# Altium PCB MCU_PCB.PcbDoc
Units mm, origin at the board's own origin, x right, y up, seen from the top; angles counter-clockwise.
Board outline 59 x 83 mm, 4 copper layers (Top Layer, Ground Plane, Power Plane, Bottom Layer), stack 0.844 mm thick; 26 components, 51 nets, 210 pads, 40 vias.
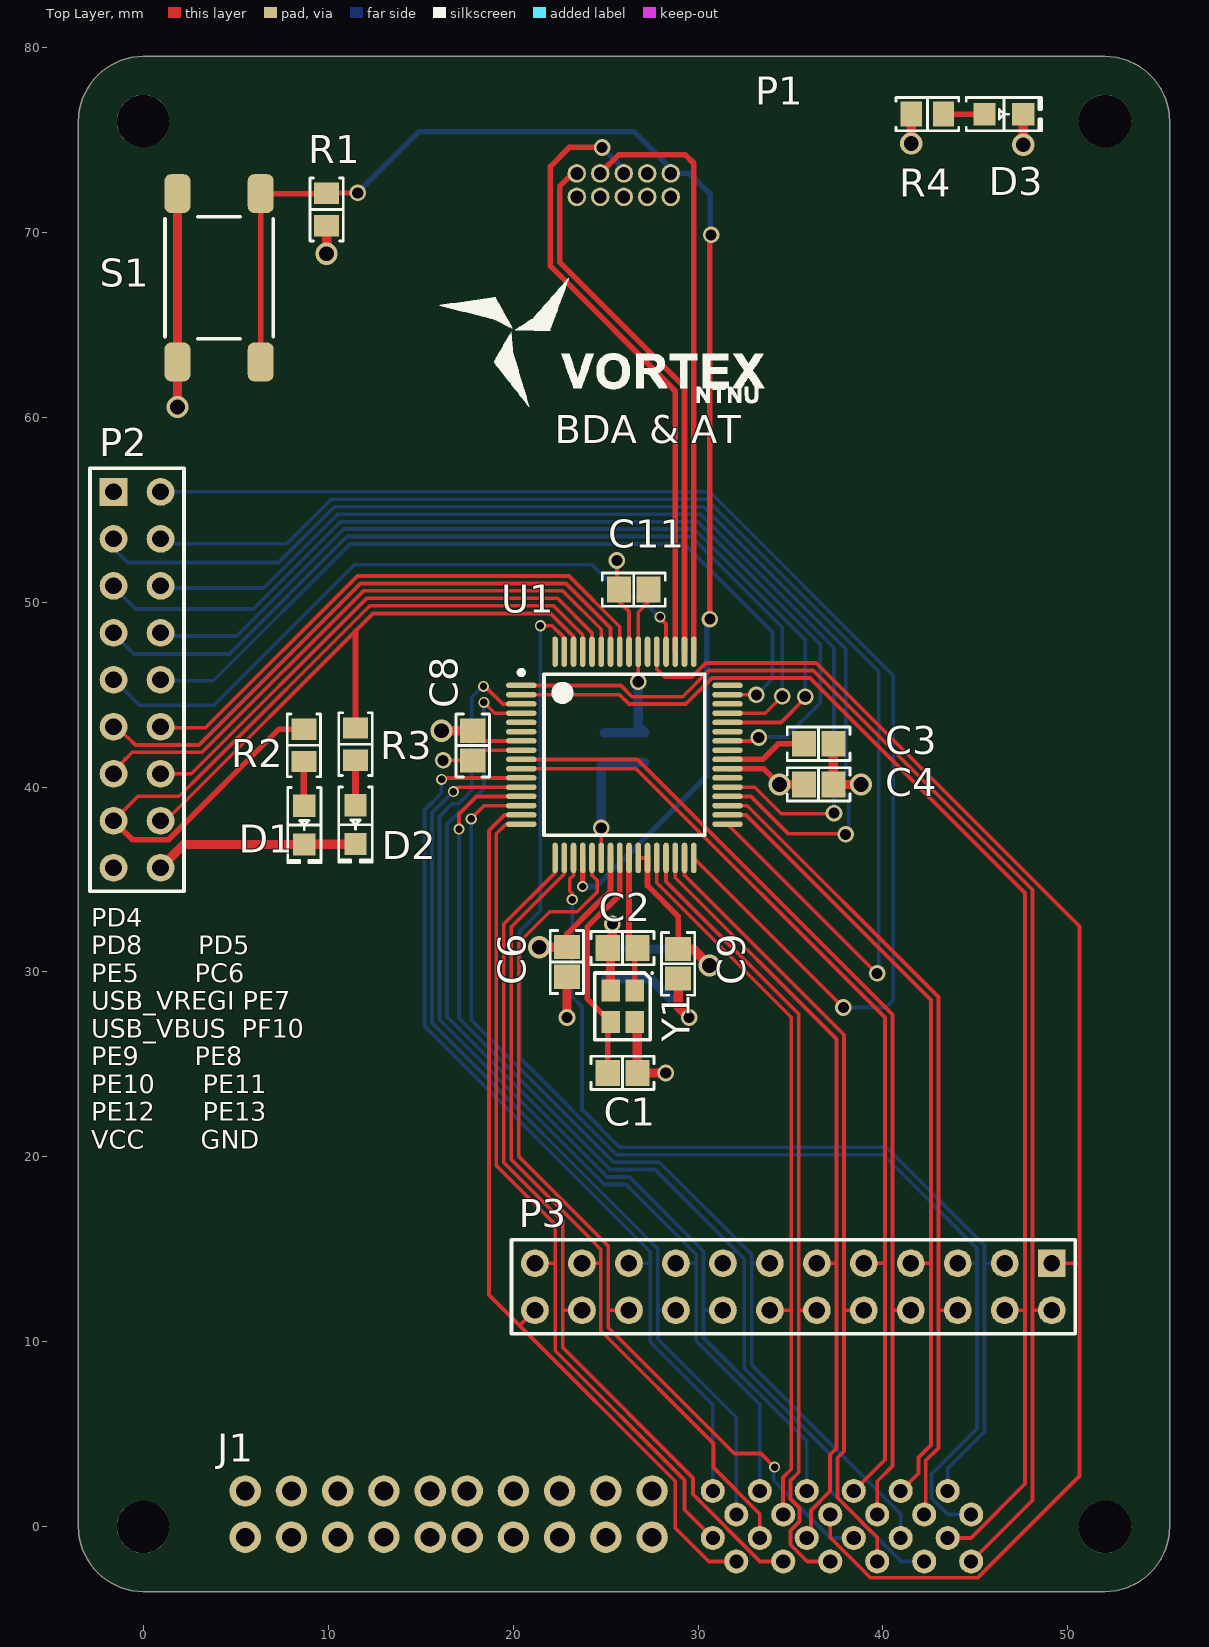
[diagram p0: Top Layer view]
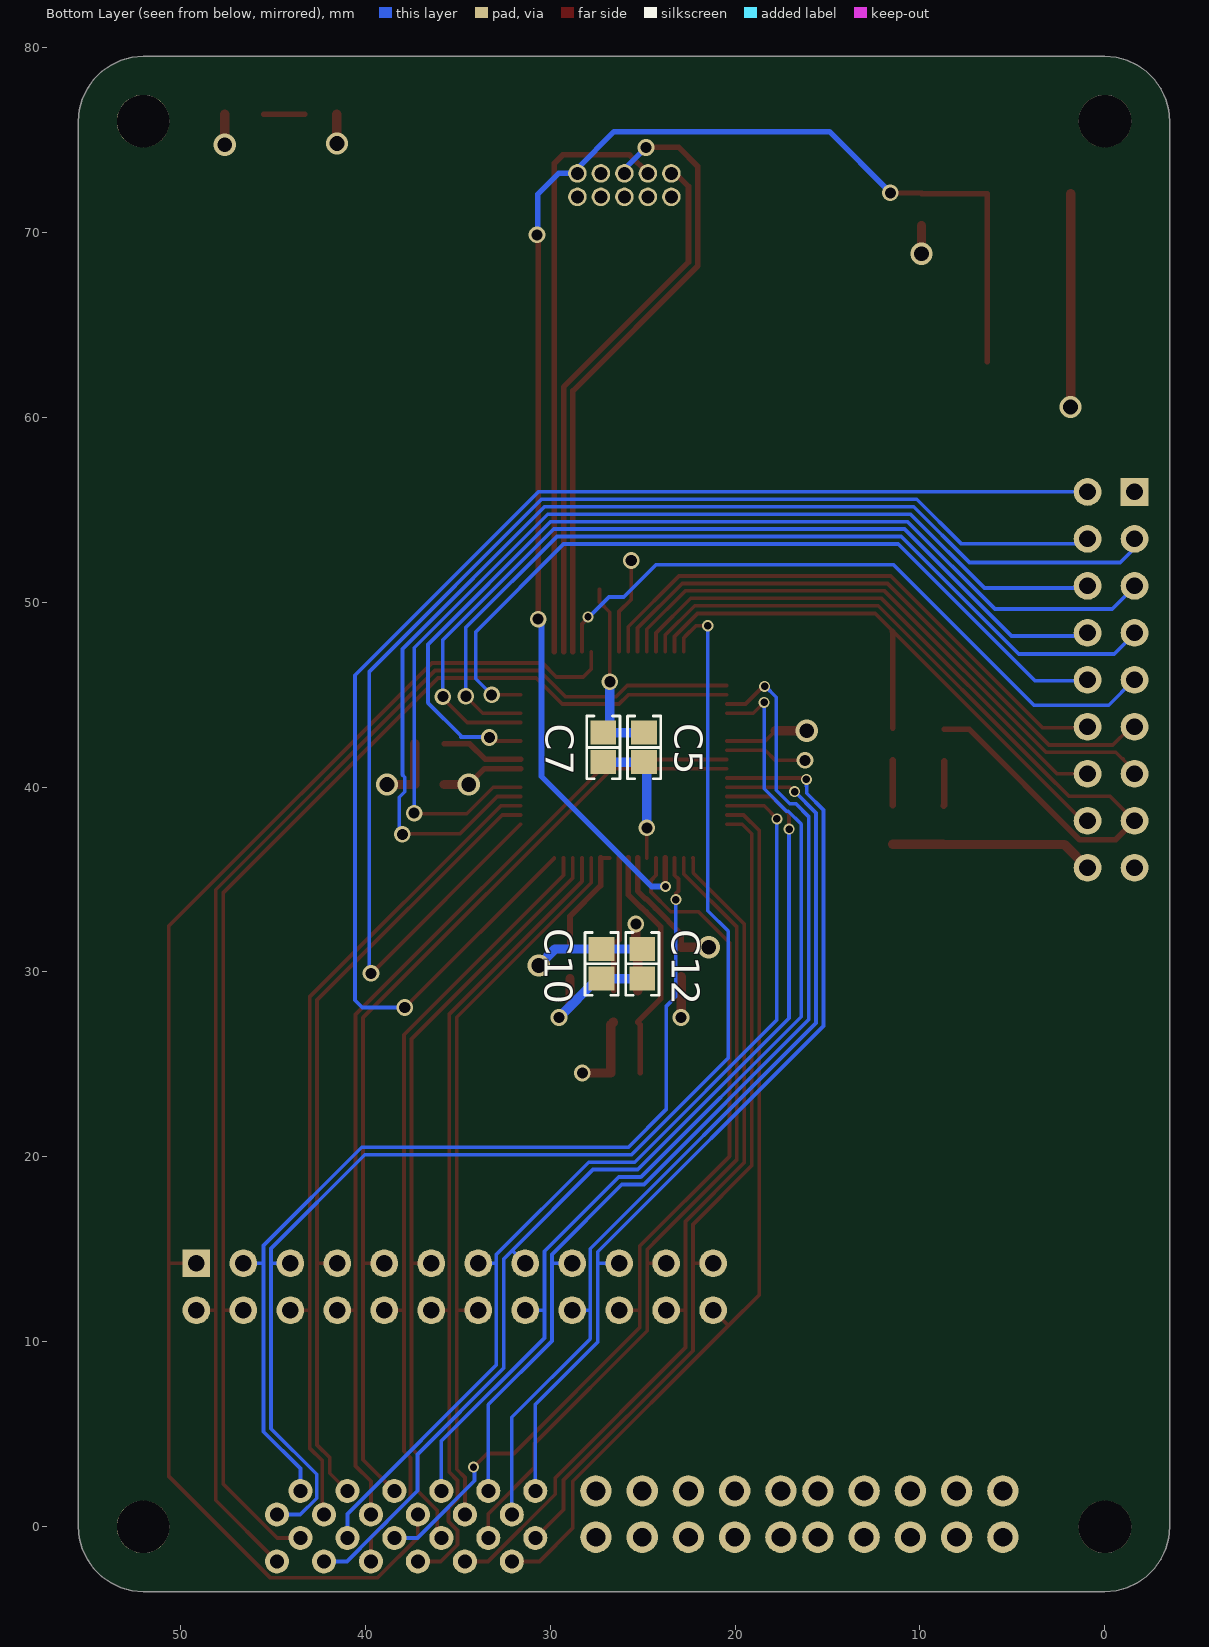
[diagram p1: Bottom Layer view, seen from below]
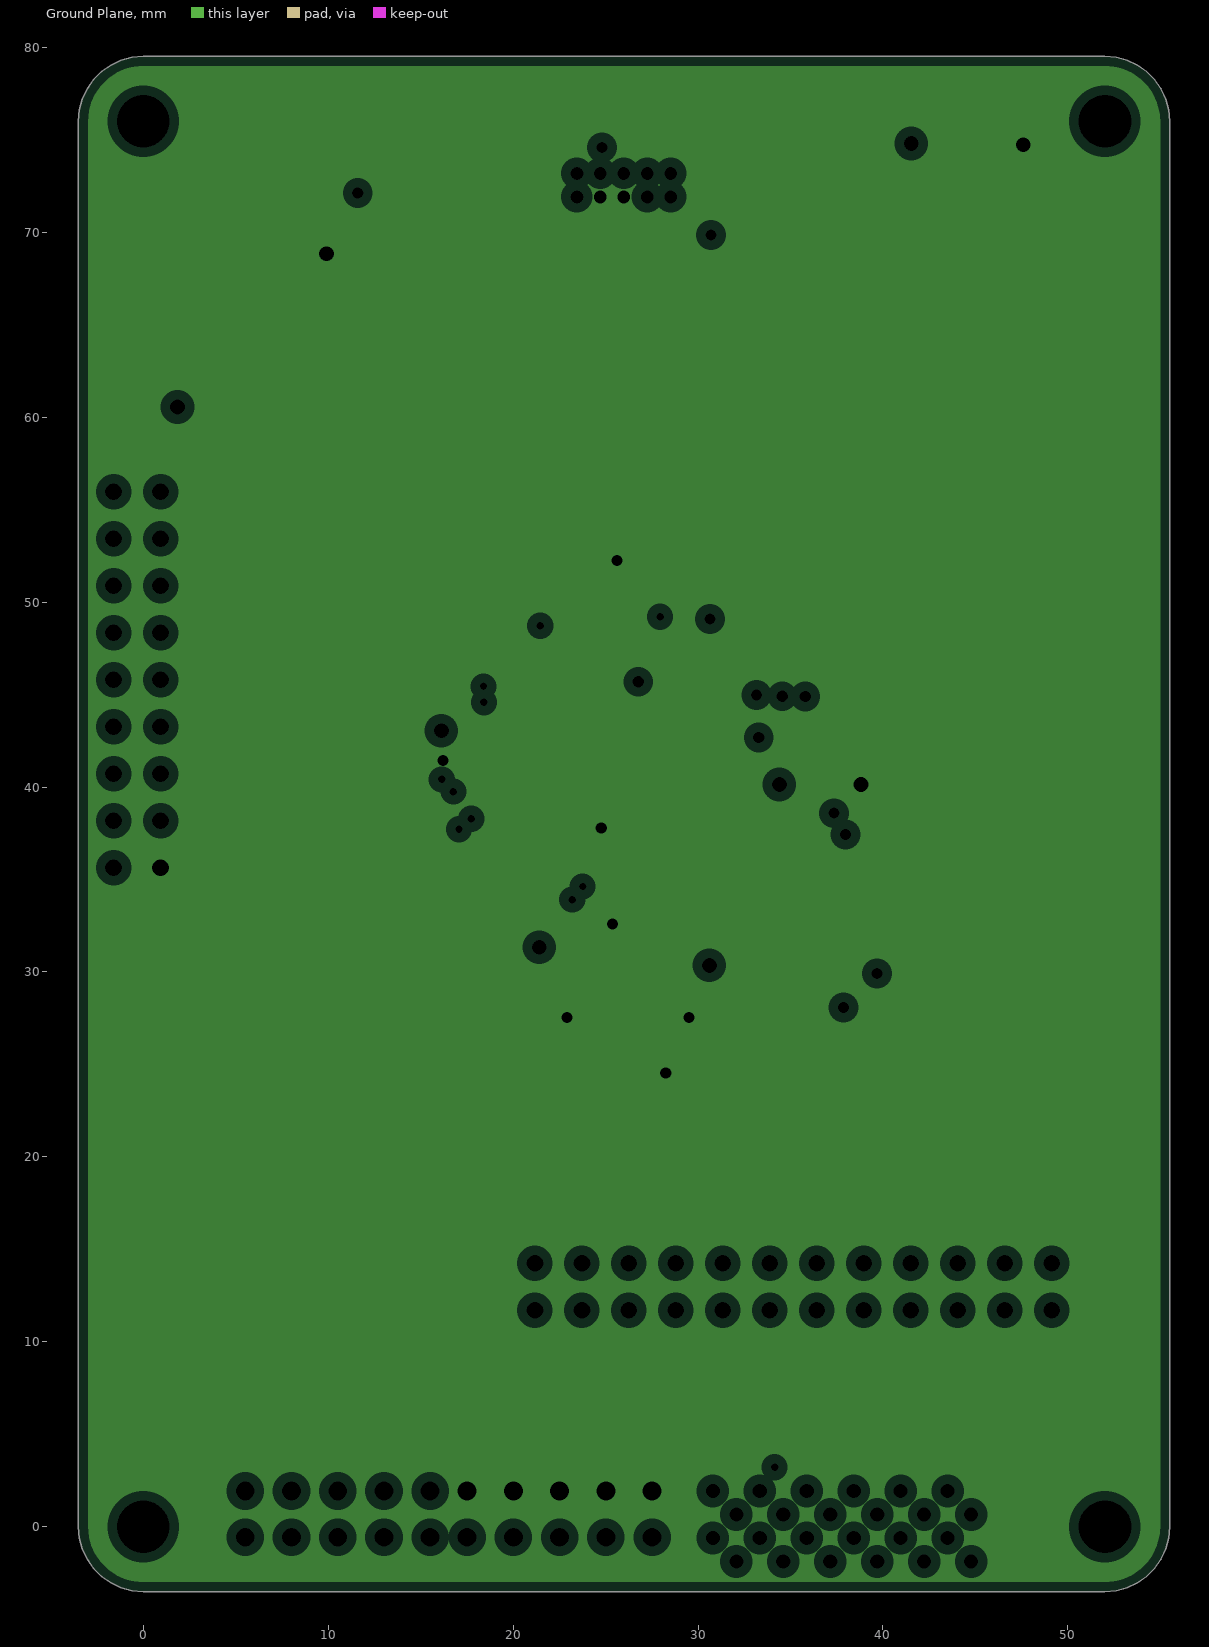
[diagram p2: Ground Plane, clearances drawn from the general rule]
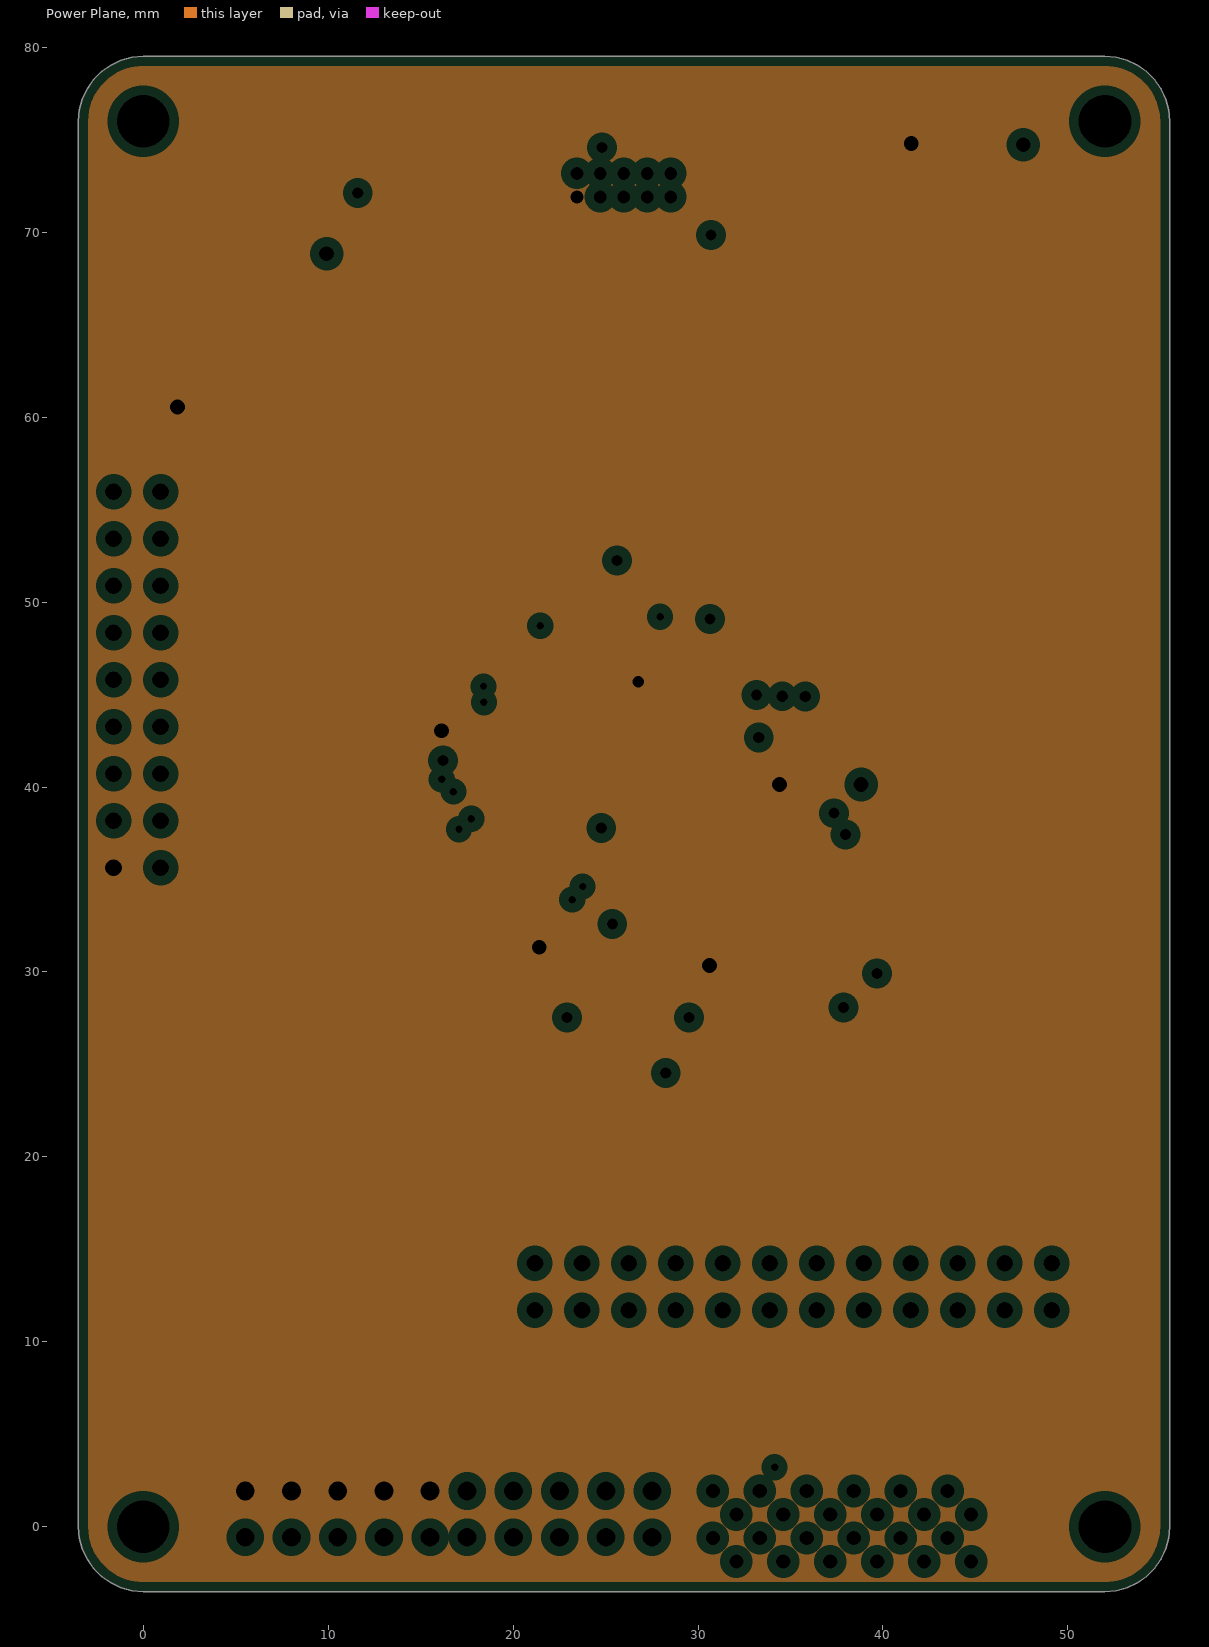
[diagram p3: Power Plane, clearances drawn from the general rule]
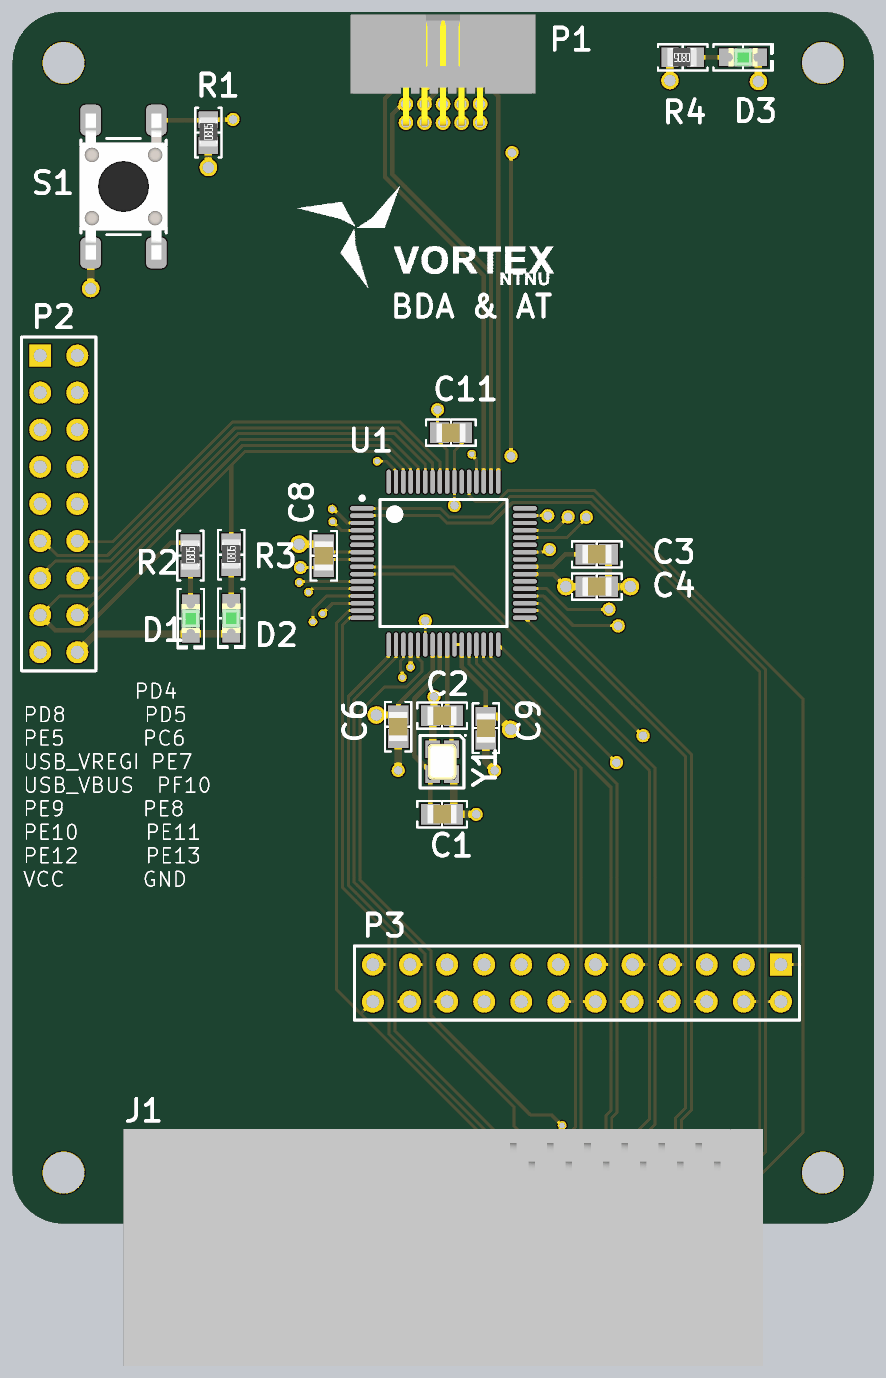
[diagram p4: 3D render of the assembled board from above, using the file's embedded part models]
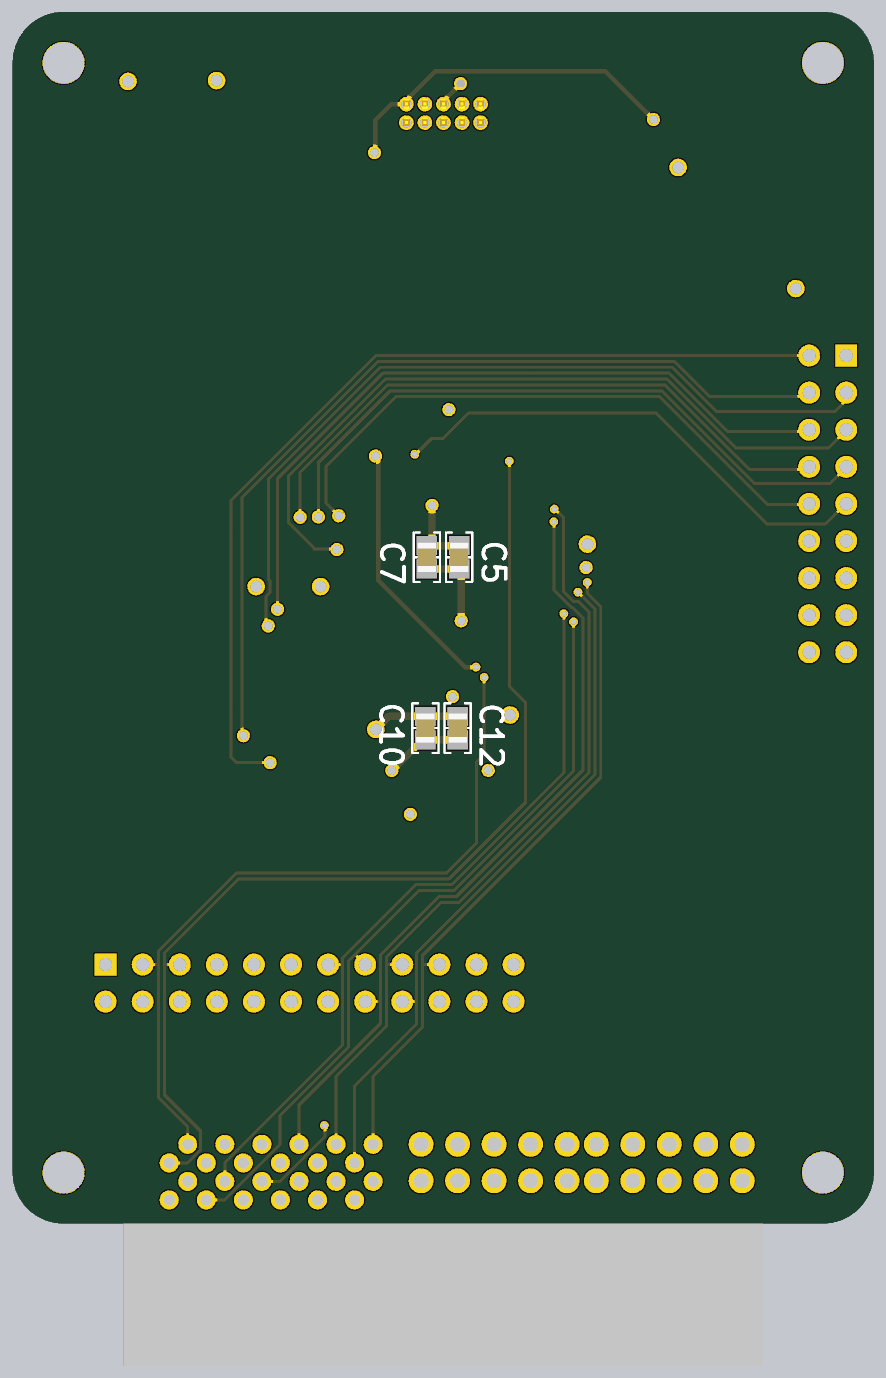
[diagram p5: 3D render of the assembled board from below, using the file's embedded part models]

## Layer stack, top to bottom
Top Solder: solder mask 0.0102, Solder Resist, Dk 3.5
Top Layer: signal copper 0.0356
Dielectric 1: core 0.32, FR-4, Dk 4.8
Ground Plane: plane copper 0.036, net GND
Dielectric 3: prepreg 0.127, Dk 4.2
Power Plane: plane copper 0.036, net VCC
Dielectric 4: core 0.254, Dk 4.2
Bottom Layer: signal copper 0.0356
Bottom Solder: solder mask 0.0102, Solder Resist, Dk 3.5

## Board outline
52,-3.5 52.608,-3.447 53.197,-3.289 53.75,-3.031 54.25,-2.681 54.681,-2.25 55.031,-1.75 55.289,-1.197 55.447,-0.608 55.5,0 55.5,76 55.447,76.608 55.289,77.197 55.031,77.75 54.681,78.25 54.25,78.681 53.75,79.031 53.197,79.289 52.608,79.447 52,79.5 0,79.5 -0.608,79.447 -1.197,79.289 -1.75,79.031 -2.25,78.681 -2.681,78.25 -3.031,77.75 -3.289,77.197 -3.447,76.608 -3.5,76 -3.5,0 -3.447,-0.608 -3.289,-1.197 -3.031,-1.75 -2.681,-2.25 -2.25,-2.681 -1.75,-3.031 -1.197,-3.289 -0.608,-3.447 0,-3.5

## Design rules (kind name [scope] priority, off if disabled: settings)
Clearance [All] p1: gap=0.254 ignorepadtopadclearanceinfootprint=FALSE except(0: Arc-Hole Track-Hole SMDPad-Hole THPad-Hole Via-Hole Fill-Hole Poly-Hole Region-Hole Text-Hole; 0.127: Arc-THPad Track-THPad; 0.152: Arc-SMDPad Track-SMDPad SMDPad-SMDPad; 0.2: Arc-Arc Arc-Track Track-Track)
PlaneClearance [All] p1: clearance=0.508
PlaneConnect [All] p1: planeconnectstyle=Relief reliefexpansion=0.508 reliefentries=4 reliefconductorwidth=0.254 reliefairgap=0.254
PolygonConnect [All] p1: connectstyle=Relief reliefconductorwidth=0.254 reliefentries=4 polygonreliefangle="90 Angle" airgapwidth=0.254
RoutingVias "Routing Via PWR" [(InNet('GND') OR InNet('VCC'))] p1: holewidth=0.8 width=1.2 viastyle="Through Hole" minholewidth=0.6 minwidth=0.9 maxholewidth=1 maxwidth=1.4
RoutingVias [All] p2: holewidth=0.6 width=0.9 viastyle="Through Hole" minholewidth=0.4 minwidth=0.6 maxholewidth=0.8 maxwidth=1.2
SolderMaskExpansion [All] p1: expansion=0.102
Width "Width PWR" [(InNet('GND') OR InNet('VCC'))] p1: maxlimit=0.762 minlimit=0.203 preferedwidth=0.508
Width [All] p2: maxlimit=0.356 minlimit=0.203 preferedwidth=0.3
28 further rules are at their usual default settings.

## Components (designator, comment, footprint, x,y, rotation, side; value= is the part's Value field where it differs from the comment)
C1 "10pF" "CAP 0805/2012" 25.918,24.541 r0 top
C2 "10pF" "CAP 0805/2012" 25.918,31.295 r0 top
C3 "1uF" "CAP 0805/2012" 36.518,42.341 r180 top
C4 "10uF" "CAP 0805/2012" 36.518,40.136 r180 top
C5 "10uF" "CAP 0805/2012" 24.918,42.141 r90 bottom
C6 "10uF" "CAP 0805/2012" 22.914,30.541 r90 top
C7 "0.10uF" "CAP 0805/2012" 27.123,42.141 r90 bottom
C8 "0.10uF" "CAP 0805/2012" 17.818,42.241 r90 top
C9 "10000pF" "CAP 0805/2012" 28.922,30.441 r270 top
C10 "0.10uF" "CAP 0805/2012" 27.218,30.441 r90 bottom
C11 "0.10uF" "CAP 0805/2012" 26.527,50.675 r0 top
C12 "10000pF" "CAP 0805/2012" 25.014,30.441 r270 bottom
D1 "Green" "LED 0805/2012 GREEN" 8.712,37.939 r270 top
D2 "Green" "LED 0805/2012 GREEN" 11.481,37.964 r270 top
D3 "Green" "LED 0805/2012 GREEN" 46.535,76.377 r0 top
J1 "0459854142" CONN_HEADER_4PWR_24SGL_2.36MM 44.768,-1.869 r0 top
P1 "3220-10-0200-00" HDRRA10W40P127_2X5_1265X750X540P 23.444,71.907 r0 top
P2 "Header 9X2A" HDR2X9_CEN -1.6,55.956 r270 top
P3 "Header 12X2" HDR2X12 49.124,14.249 r180 top
R1 "10k" "RES 0805/2012" 9.916,71.223 r90 top
R2 "130" "RES 0805/2012" 8.687,42.254 r90 top
R3 "130" "RES 0805/2012" 11.481,42.316 r90 top
R4 "130" "RES 0805/2012" 42.399,76.377 r180 top
S1 "FSM4JSMATR" "TE FSM4JSMA" 4.105,67.532 r0 top
U1 "EFM32GG942F1024G-E-QFP64" TQFP64_N 26.018,41.741 r0 top
Y1 "16MHz" "NDK NX2520SA" 25.918,28.141 r270 top

## Footprints (in the part's own frame and the unit in brackets; to place one, negate y for a bottom-side part, rotate by r counter-clockwise, add the part's x,y. Pads: shape width x height; smd on the part's side, far side on the other; paste and mask are expansions set on the pad)
"CAP 0805/2012" [mm] "Chip Capacitor, 2-Leads, Body 2.00x1.20mm, IPC Medium Density"
  rect 1.3x1.4 smd: 1(-0.8,0) 2(0.8,0)
  silkscreen extent -1.7,-0.9 1.7,0.9, body extent -1,-0.64 1,0.64, height 1.26
CONN_HEADER_4PWR_24SGL_2.36MM [mm]
  round 1.3 hole 0.76: 1(0,0) 2(-1.27,1.27) 3(-2.54,0) 4(-3.81,1.27) 5(-5.08,0) 6(-6.35,1.27) 7(-7.62,0) 8(-8.89,1.27) 9(-10.16,0) 10(-11.43,1.27) 11(-12.7,0) 12(-13.97,1.27) 13(0,2.53) 14(-1.27,3.81) 15(-2.54,2.53) 16(-3.81,3.81) 17(-5.08,2.53) 18(-6.35,3.81) 19(-7.62,2.53) 20(-8.89,3.81) 21(-10.16,2.53) 22(-11.43,3.81) 23(-12.7,2.53) 24(-13.97,3.81)
  round 1.7 hole 1.02: P1A(-27.25,1.31) P1A(-24.75,1.31) P1A(-22.25,1.31) P1A(-19.75,1.31) P1A(-17.25,1.31) P1B(-27.25,3.81) P1B(-24.75,3.81) P1B(-22.25,3.81) P1B(-19.75,3.81) P1B(-17.25,3.81) P2A(-39.25,1.31) P2A(-36.75,1.31) P2A(-34.25,1.31) P2A(-31.75,1.31) P2A(-29.25,1.31) P2B(-39.25,3.81) P2B(-36.75,3.81) P2B(-34.25,3.81) P2B(-31.75,3.81) P2B(-29.25,3.81)
  body extent -40.65,-11.41 3.13,4.87, height 7.49
HDR2X9_CEN [mm] "Connector; Header; 9x2 Position"
  rect 1.5x1.5 hole 0.9: 1(0,0)
  round 1.5 hole 0.9: 2(2.54,0) 3(5.08,0) 4(7.62,0) 5(10.16,0) 6(12.7,0) 7(15.24,0) 8(17.78,0) 9(20.32,0) 10(0,2.54) 11(2.54,2.54) 12(5.08,2.54) 13(7.62,2.54) 14(10.16,2.54) 15(12.7,2.54) 16(15.24,2.54) 17(17.78,2.54) 18(20.32,2.54)
  silkscreen extent -1.27,-1.27 21.59,3.81
HDR2X12 [mm] "Connector; Header; 12x2 Position"
  rect 1.5x1.5 hole 0.9: 1(0,0)
  round 1.5 hole 0.9: 2(0,2.54) 3(2.54,0) 4(2.54,2.54) 5(5.08,0) 6(5.08,2.54) 7(7.62,0) 8(7.62,2.54) 9(10.16,0) 10(10.16,2.54) 11(12.7,0) 12(12.7,2.54) 13(15.24,0) 14(15.24,2.54) 15(17.78,0) 16(17.78,2.54) 17(20.32,0) 18(20.32,2.54) 19(22.86,0) 20(22.86,2.54) 21(25.4,0) 22(25.4,2.54) 23(27.94,0) 24(27.94,2.54)
  silkscreen extent -1.27,-1.27 29.21,3.81
HDRRA10W40P127_2X5_1265X750X540P [mm]
  round 1 hole 0.7: 1(0,0) 2(0,1.27) 3(1.27,0) 4(1.27,1.27) 5(2.54,0) 6(2.54,1.27) 7(3.81,0) 8(3.81,1.27) 9(5.08,0) 10(5.08,1.27)
  body extent -3.78,-0.18 8.87,7.39, height 5.18
"LED 0805/2012 GREEN" [mm] "Chip Diode, 2-Leads, Body 2.00x1.25mm, IPC Medium Density"
  rect 1.2x1.2 smd: 1(-1.05,0) 2(1.05,0)
  silkscreen extent -2.03,-0.9 2.03,0.9, body extent -1,-0.62 1,0.63, height 0.9
"NDK NX2520SA" [mm] "Crystal, 4-Leads, Body 2.00x2.50mm, Pitch 1.70mm, IPC Medium Density"
  rect 1.2x1 smd: 1(-0.85,0.65) 2(-0.85,-0.65) 3(0.85,-0.65) 4(0.85,0.65)
  silkscreen extent -1.85,-1.5 1.8,1.65, body extent -1.26,-1.01 1.26,1.01, height 0.5
"RES 0805/2012" [mm] "Chip Resistor, 2-Leads, Body 2.00x1.25mm, IPC Medium Density"
  rect 1.15x1.35 smd: 1(-0.875,0) 2(0.875,0)
  silkscreen extent -1.7,-0.9 1.7,0.9, body extent -0.95,-0.62 1.05,0.63, height 0.6
"TE FSM4JSMA" [mm]
  rrect50% 1.4x2.1 smd: 1(2.25,4.55) 2(2.25,-4.55) 3(-2.25,4.55) 4(-2.25,-4.55)
  silkscreen extent -2.92,-3.3 2.92,3.3, body extent -3,-5 3,5, height 5.08
TQFP64_N [mm]
  oval 1.65x0.3 smd: 1(-5.575,3.75) 2(-5.575,3.25) 3(-5.575,2.75) 4(-5.575,2.25) 5(-5.575,1.75) 6(-5.575,1.25) 7(-5.575,0.75) 8(-5.575,0.25) 9(-5.575,-0.25) 10(-5.575,-0.75) 11(-5.575,-1.25) 12(-5.575,-1.75) 13(-5.575,-2.25) 14(-5.575,-2.75) 15(-5.575,-3.25) 16(-5.575,-3.75) 33(5.575,-3.75) 34(5.575,-3.25) 35(5.575,-2.75) 36(5.575,-2.25) 37(5.575,-1.75) 38(5.575,-1.25) 39(5.575,-0.75) 40(5.575,-0.25) 41(5.575,0.25) 42(5.575,0.75) 43(5.575,1.25) 44(5.575,1.75) 45(5.575,2.25) 46(5.575,2.75) 47(5.575,3.25) 48(5.575,3.75)
  oval 0.3x1.65 smd: 17(-3.75,-5.575) 18(-3.25,-5.575) 19(-2.75,-5.575) 20(-2.25,-5.575) 21(-1.75,-5.575) 22(-1.25,-5.575) 23(-0.75,-5.575) 24(-0.25,-5.575) 25(0.25,-5.575) 26(0.75,-5.575) 27(1.25,-5.575) 28(1.75,-5.575) 29(2.25,-5.575) 30(2.75,-5.575) 31(3.25,-5.575) 32(3.75,-5.575) 49(3.75,5.575) 50(3.25,5.575) 51(2.75,5.575) 52(2.25,5.575) 53(1.75,5.575) 54(1.25,5.575) 55(0.75,5.575) 56(0.25,5.575) 57(-0.25,5.575) 58(-0.75,5.575) 59(-1.25,5.575) 60(-1.75,5.575) 61(-2.25,5.575) 62(-2.75,5.575) 63(-3.25,5.575) 64(-3.75,5.575)
  silkscreen extent -5.7,-4.35 4.35,4.57, body extent -5,-5 5,5, height 1.2

## Part data
C1 C2: library part C0805C100J1GACTU, "CAP CER 10PF 100V NP0 0805", Device Package="0805 (2012 Metric)", Manufacturer=Kemet, Supplier Part Number 1=399-1109-2-ND, TemperatureCoefficient="C0G, NP0", TemperatureRange="-55C ~ 125C", Tolerance=5%, Voltage=100V, ComponentLink1Description=Datasheet, ComponentLink1URL=http://www.kemet.com/docfinder?Partnumber=C0805C100J1GACTU, ComponentLink2Description="Digi-Key Listing", ComponentLink2URL=https://www.digikey.com/product-detail/en/kemet/C0805C100J1GACTU/399-1109-2-ND/411108, PartId=14386, Part Number=C0805C100J1GACTU, Price=0,0236, Supplier 1=Digi-Key
C3: library part GRM219R71E105KA88D, "CAP CER 1UF 25V X7R 0805", Device Package="0805 (2012 Metric)", Manufacturer="Murata Electronics North America", Supplier Part Number 1=490-5899-2-ND, TemperatureCoefficient=X7R, TemperatureRange="-55C ~ 125C", Tolerance=10%, Voltage=25V, ComponentLink1Description=Datasheet, ComponentLink1URL=http://www.murata.com/~/media/webrenewal/support/library/catalog/products/capacitor/mlcc/c02e.pdf, ComponentLink2Description="Digi-Key Listing", ComponentLink2URL=https://www.digikey.com/product-detail/en/murata-electronics-north-america/GRM219R71E105KA88D/490-5899-2-ND/2546469, PartId=14171, Part Number=GRM219R71E105KA88D, Price=0,0422, Supplier 1=Digi-Key
C4 C5 C6: library part JMK212BJ106KD-T, "CAP CER 10UF 6.3V X5R 0805", Device Package="0805 (2012 Metric)", Manufacturer="Taiyo Yuden", Supplier Part Number 1=587-1304-2-ND, TemperatureCoefficient=X5R, TemperatureRange="-55C ~ 85C", Tolerance=10%, Voltage=6.3V, ComponentLink1Description=Datasheet, ComponentLink1URL=http://www.yuden.co.jp/productdata/catalog/en/mlcc_all_e.pdf, ComponentLink2Description="Digi-Key Listing", ComponentLink2URL=https://www.digikey.com/product-detail/en/taiyo-yuden/JMK212BJ106KD-T/587-1304-2-ND/930656, PartId=13750, Part Number=JMK212BJ106KD-T, Price=0,032, Supplier 1=Digi-Key
C7 C8 C10 C11: library part GRM21BR71E104KA01L, "CAP CER 0.1UF 25V X7R 0805", Device Package="0805 (2012 Metric)", Manufacturer="Murata Electronics North America", Supplier Part Number 1=490-1673-2-ND, TemperatureCoefficient=X7R, TemperatureRange="-55C ~ 125C", Tolerance=10%, Voltage=25V, ComponentLink1Description=Datasheet, ComponentLink1URL=http://www.murata.com/~/media/webrenewal/support/library/catalog/products/capacitor/mlcc/c02e.pdf, ComponentLink2Description="Digi-Key Listing", ComponentLink2URL=https://www.digikey.com/product-detail/en/murata-electronics-north-america/GRM21BR71E104KA01L/490-1673-2-ND/586699, PartId=13708, Part Number=GRM21BR71E104KA01L, Price=0,0092, Supplier 1=Digi-Key
C9 C12: library part CC0805JRX7R9BB103, "CAP CER 10000PF 50V X7R 0805", Device Package="0805 (2012 Metric)", Manufacturer=Yageo, Supplier Part Number 1=311-1857-2-ND, TemperatureCoefficient=X7R, TemperatureRange="-55C ~ 125C", Tolerance=5%, Voltage=50V, ComponentLink1Description=Datasheet, ComponentLink1URL=http://www.yageo.com/documents/recent/UPY-GPHC_X7R_6.3V-to-50V-v12.pdf, ComponentLink2Description="Digi-Key listing", ComponentLink2URL=http://digikey.com/product-detail/en/CC0805JRX7R9BB103/311-1857-2-ND/5195264, PartId=5807, Part Number=CC0805JRX7R9BB103, Price=0,0193, Supplier 1=Digi-Key, Type=-
D1 D2 D3: library part LTST-C171KGKT, "LED GREEN CLEAR 0805 SMD", Current (Test)=20mA, Device Package="0805 (2012 Metric)", Manufacturer="Lite-On Inc.", Supplier Part Number 1=160-1426-2-ND, Voltage Forward=2V, Colour=Green, ComponentLink1Description=Datasheet, ComponentLink1URL=http://optoelectronics.liteon.com/upload/download/DS22-2000-118/S_110_LTST-C171KGKT.pdf, ComponentLink2Description="Digi-Key Listing", ComponentLink2URL=http://www.digikey.ca/product-detail/en/LTST-C171KGKT/160-1426-2-ND/386799, Lens Transparency=Clear, Millicandela=35mcd, PartId=7080, Part Number=LTST-C171KGKT, Price=0,0638, Supplier 1=Digi-Key, Type="Surface Mount", Viewing Angle=130
J1: Supplier Part Number 1=WM8736-ND, ComponentLink1Description="Manufacturer Link", ComponentLink1URL=http://www.molex.com/, ComponentLink2Description=Datasheet, ComponentLink2URL=http://www.molex.com/pdm_docs/sd/459854111_sd.pdf, Mounting Type="Through Hole", Number Of Positions=28, Number Of Rows=2, Part Number=0459854142, Supplier 1=Digi-Key
P1: Supplier Part Number 1=1175-1628-ND, ComponentLink1Description="Manufacturer Link", ComponentLink1URL=http://www.cnctech.us/, ComponentLink2Description=Datasheet, ComponentLink2URL=http://cnctech.us/pdfs/3220-XX-0200-00.pdf, Mounting Type="Through Hole", Number Of Positions=10, Number Of Rows=2, Part Number=3220-10-0200-00, Supplier 1=Digi-Key
P2: "Header, 9-Pin, Dual row", LatestRevisionDate=17-Jul-2002, LatestRevisionNote="Re-released for DXP Platform.", Publisher="Altium Limited"
P3: "Header, 12-Pin, Dual row", LatestRevisionDate=17-Jul-2002, LatestRevisionNote="Re-released for DXP Platform.", Publisher="Altium Limited"
R1: library part ERJ-6ENF1002V, "RES SMD 10K OHM 1% 1/8W 0805", Device Package="0805 (2012 Metric)", Manufacturer="Panasonic Electronic Components", PowerRating="0.125W, 1/8W", Supplier Part Number 1=P10.0KCTR-ND, TemperatureCoefficient=100ppm/C, TemperatureRange="-55C ~ 155C", Tolerance=1%, ComponentLink1Description=Datasheet, ComponentLink1URL=http://industrial.panasonic.com/www-cgi/jvcr13pz.cgi?E+PZ+3+AOA0002+ERJ6ENF1002V+7+WW, ComponentLink2Description="Digi-Key listing", ComponentLink2URL=http://digikey.com/product-detail/en/ERJ-6ENF1002V/P10.0KCTR-ND/111474, PartId=1947, Part Number=ERJ-6ENF1002V, Price=0,0073, Supplier 1=Digi-Key, Type="Thick Film"
R2 R3 R4: library part ERJ-6ENF1300V, "RES SMD 130 OHM 1% 1/8W 0805", Device Package="0805 (2012 Metric)", Manufacturer="Panasonic Electronic Components", PowerRating="0.125W, 1/8W", Supplier Part Number 1=P130CTR-ND, TemperatureCoefficient=100ppm/C, TemperatureRange="-55C ~ 155C", Tolerance=1%, ComponentLink1Description=Datasheet, ComponentLink1URL=http://industrial.panasonic.com/www-cgi/jvcr13pz.cgi?E+PZ+3+AOA0002+ERJ6ENF1300V+7+WW, ComponentLink2Description="Digi-Key listing", ComponentLink2URL=http://digikey.com/product-detail/en/ERJ-6ENF1300V/P130CTR-ND/111111, PartId=2345, Part Number=ERJ-6ENF1300V, Price=0,0073, Supplier 1=Digi-Key, Type="Thick Film"
S1: "SWITCH TACTILE SPST-NO 0.05A 24V", Contact Rating @ Voltage="0.05A @ 24VDC", Illumination Type, Colour=-, Manufacturer="TE Connectivity Alcoswitch Switches", Operating Force=160gf, Operating Temperature="-35C ~ 85C", Supplier Part Number 1=450-1759-2-ND, Actuator Orientation="Top Actuated", Actuator Type=Standard, Circuit=SPST-NO, ComponentLink1Description=Datasheet, ComponentLink1URL=http://www.te.com/commerce/DocumentDelivery/DDEController?Action=srchrtrv&DocNm=2-1437565-7&DocType=Customer+Drawing&DocLang=English, ComponentLink2Description="Digi-Key Listing", ComponentLink2URL=http://www.digikey.com/product-detail/en/FSM4JSMATR/450-1759-2-ND/529675, Illumination=Non-Illuminated, Illumination Voltage=-, Mechanical Life="100,000 Cycles", PartId=8249, Part Number=FSM4JSMATR, Price=0,128, Supplier 1=Digi-Key, Switch Function=Off-Mom, Switch Travel=0.25mm
U1: Supplier Part Number 1=336-4157-ND, ComponentLink1Description="Manufacturer Link", ComponentLink1URL=https://www.silabs.com, ComponentLink2Description=Datasheet, ComponentLink2URL=https://www.silabs.com/documents/public/data-sheets/EFM32GG942.pdf, Part Number=EFM32GG942F1024G-E-QFP64, Supplier 1=Digi-Key
Y1: library part NX2520SA-16.000000MHZ, "CRYSTAL 16.0000MHZ 10PF SMD", Device Package="4-SMD, No Lead (DFN, LCC)", Frequency Stability=10ppm, Load Capacitance=10pF, Manufacturer=NDK, Operating Mode=Fundamental, Supplier Part Number 1=644-1059-2-ND, ComponentLink1Description=Datasheet, ComponentLink1URL=http://media.digikey.com/pdf/Data%20Sheets/NDK%20PDFs/NX2520SA.pdf, ComponentLink2Description="Digi-Key Listing", ComponentLink2URL=http://www.digikey.com/product-detail/en/NX2520SA-16.000000MHZ/644-1059-2-ND/1128841, ESR="80 Ohm", Frequency=16MHz, Frequency Tolerance=10ppm, PartId=8496, Part Number=NX2520SA-16.000000MHZ, Price=0,7336, Supplier 1=Digi-Key, Type="MHz Crystal"

## Free pads (board coordinates)
  round 2.845 hole 2.845: 1(0,0) 1(0,76) 1(52,0) 1(52,76)

## Via types
v1: diameter 0.9, hole 0.6, Top Layer to Bottom Layer, 20 vias
v2: diameter 0.6, hole 0.4, Top Layer to Bottom Layer, 11 vias
v3: diameter 1.2, hole 0.8, Top Layer to Bottom Layer, 9 vias

## Nets (pads, with @x,y where several pads share a name; then routed paths per layer and width w, separated by ;. In a path a pad name is that pad's centre, name@x,y a point inside that pad or via, vN(x,y) a via of type N, cw(c..) or ccw(c..) an arc to the next point about the centre after c; other vN are vias at no path point)
CLK+: C1.1 U1.24 Y1.3 | length 12.9
  Top Layer w0.3: C1.1 25.118,27.141 Y1.3 24.018,28.541 24.018,32.456 24.807,33.245 25.032,33.469 25.066,33.469 25.768,34.171 25.768,34.675 U1.24
CLK-: C2.2 U1.25 Y1.1 | length 7.4
  Top Layer w0.3: U1.25 26.268,31.745 C2.2 26.568,31.145 Y1.1
GND: C1.2 C2.1 C3.1 C4.1 C5.1 C6.1 C7.1 C8.1 C9.2 C10.1 C11.1 C12.2 D1.2 D2.2 D3.2 J1.P1B P1.3 P1.5 P2.18 R1.1 U1.8 U1.22 U1.56 Y1.2 Y1.4 | length 53.2
  Top Layer w0.203: v1(16.218,41.441) C8.1 18.368,41.991 U1.8 ; U1.22 v1(24.768,37.791) ; v1(25.613,52.249) 25.613,50.145 26.268,49.49 U1.56
  Top Layer w0.508: P2.18 2.193,36.889 D1.2 8.738,36.914 D2.2 ; v3(9.916,68.836) R1.1 ; C6.1 22.914,27.545 v1(22.918,27.541) ; v1@25.253,32.595 v1(25.365,32.595) 25.365,31.541 C2.1 25.268,31.145 Y1.2 ; Y1.4 26.718,27.141 C1.2 26.721,24.538 v1(28.255,24.538) ; C9.2 28.922,28.136 v1(29.518,27.541) ; C3.1 C4.1 v3(38.814,40.136) ; v3(47.585,74.727) D3.2
  Bottom Layer w0.508: v1(24.768,37.791) 24.768,41.191 C5.1 C7.1 ; C12.2 C10.1 27.418,29.641 v1(29.518,27.541)
GPIO0: J1.19 P3.1 U1.53 | length 79.3
  Top Layer w0.203: U1.53 27.772,47.312 27.772,46.382 28.204,45.95 29.666,45.95 30.417,46.701 36.391,46.701 50.622,32.47 50.622,14.275 ; J1.19 37.148,-0.572 39.324,-2.748 45.139,-2.748 45.139,-2.741 50.622,2.742 50.622,14.275 ; P3.1 50.597,14.249 50.622,14.275
GPIO1: J1.20 P3.16 U1.4 | length 55.6
  Top Layer w0.203: v2(18.425,44.579) 19.013,43.991 U1.4
  Bottom Layer w0.203: v2(18.425,44.579) 18.425,39.906 17.212,38.694 17.125,38.694 16.423,37.992 16.423,27.579 25.091,18.91 26.288,18.91 30.302,14.896 30.302,11.735 ; P3.16 30.328,11.709 30.302,11.735 ; J1.20 35.878,4.638 30.302,10.214 30.302,11.735
GPIO2: J1.21 P3.14 U1.28 | length 39.9
  Top Layer w0.203: U1.28 27.768,34.829 35.042,27.555 35.042,11.709 ; P3.14 35.042,11.709 ; J1.21 34.596,0.672 34.596,2.672 35.042,3.117 35.042,11.709
GPIO3: J1.22 P3.17 U1.3 | length 56.1
  Top Layer w0.203: v2(18.399,45.442) 18.488,45.442 19.44,44.491 U1.3
  Bottom Layer w0.203: v2@18.38,45.461 17.769,44.85 17.769,39.821 17.045,39.097 16.704,39.097 16.02,38.413 16.02,27.412 24.924,18.507 26.121,18.507 29.899,14.729 29.899,14.275 ; P3.17 29.874,14.249 29.899,14.275 ; J1.22 33.338,6.607 29.899,10.047 29.899,14.275
GPIO4: J1.23 P3.18 U1.12 | length 51.1
  Top Layer w0.203: v2(16.774,39.753) 17.012,39.991 U1.12
  Bottom Layer w0.203: v2(16.774,39.753) 15.617,38.595 15.617,27.245 27.825,15.036 27.825,11.735 ; P3.18 27.85,11.709 27.825,11.735 ; J1.23 32.068,5.92 27.825,10.164 27.825,11.735
GPIO5: J1.24 P3.19 U1.11 | length 50.8
  Top Layer w0.203: v2(16.139,40.413) 16.215,40.489 20.442,40.489 U1.11
  Bottom Layer w0.203: v2(16.139,40.413) 16.139,40.045 16.118,40.024 16.118,39.667 15.213,38.762 15.213,27.078 27.422,14.869 27.422,14.249 ; P3.19 27.422,14.249 ; J1.24 30.798,6.62 27.422,9.997 27.422,14.249
NetC3_2: C3.2 U1.40 | length 4.5
  Top Layer w0.3: U1.40 33.498,41.491 34.348,42.341 C3.2
NetD1_1: D1.1 R2.1 | length 2.4
  Top Layer w0.356: R2.1 8.687,39.014 D1.1
NetD2_1: D2.1 R3.1 | length 2.4
  Top Layer w0.356: D2.1 R3.1
NetD3_1: D3.1 R4.1 | length 2.2
  Top Layer w0.3: R4.1 D3.1
PC6: P2.12 U1.37 | length 56.4
  Top Layer w0.203: U1.37 33.071,39.991 34.503,38.559 37.322,38.559 v1(37.348,38.584)
  Bottom Layer w0.203: P2.12 1.057,50.759 6.518,50.759 10.508,54.75 ; 10.516,54.751 30.13,54.751 37.348,47.534 v1(37.348,38.584)
PD4: P2.10 U1.32 | length 75.6
  Top Layer w0.203: U1.32 v1(37.856,28.078)
  Bottom Layer w0.203: P2.10 P2.10@0.943,55.959 ; P2.10@0.94,55.961 30.631,55.961 40.548,46.044 40.548,28.475 40.151,28.078 v1(37.856,28.078)
PD5: P2.11 U1.33 | length 71.7
  Top Layer w0.203: U1.33 39.661,29.923 v1(39.685,29.923)
  Bottom Layer w0.203: P2.11@0.787,53.264 0.893,53.158 7.776,53.158 10.174,55.556 ; 10.185,55.558 30.464,55.558 39.77,46.253 39.77,30.008 v1(39.685,29.923)
PD8: P2.2 U1.36 | length 62.3
  Top Layer w0.203: U1.36 32.86,39.491 34.884,37.467 37.957,37.467 v1(37.983,37.441)
  Bottom Layer w0.203: P2.2 -1.6,52.908 -0.829,52.137 7.325,52.137 10.341,55.153 ; 10.363,55.154 30.297,55.154 37.983,47.469 37.983,40.657 37.858,40.532 37.858,39.74 38.153,39.445 38.153,37.612 v1(37.983,37.441)
PE5: P2.3 U1.42 | length 52.6
  Top Layer w0.203: U1.42 32.999,42.491 33.258,42.75 33.284,42.724 v1(33.284,42.674)
  Bottom Layer w0.203: P2.3 -1.6,50.825 -0.398,49.623 5.952,49.623 10.675,54.346 ; 10.693,54.348 29.963,54.348 36.604,47.707 36.604,44.55 34.833,42.779 34.833,42.699 33.309,42.699 v1(33.284,42.674)
PE7: P2.13 U1.44 | length 47.7
  Top Layer w0.203: U1.44 34.482,43.491 35.798,44.807 v1(35.798,44.883)
  Bottom Layer w0.203: P2.13 1.118,48.158 5.057,48.158 10.842,53.943 ; 10.846,53.945 29.796,53.945 35.798,47.943 v1(35.798,44.883)
PE8: P2.15 U1.57 | length 30.4
  Top Layer w0.203: P2.15@1.194,43.231 1.219,43.205 3.378,43.205 11.582,51.41 ; 11.608,51.411 23.022,51.411 25.768,48.665 U1.57
PE9: P2.6 U1.58 | length 32.7
  Top Layer w0.203: P2.6@-1.245,43.078 -0.832,42.666 -0.807,42.666 -0.418,42.278 3.021,42.278 11.749,51.006 ; 11.76,51.008 22.855,51.008 25.268,48.595 U1.58
PE10: P2.7 U1.59 | length 32.4
  Top Layer w0.203: P2.7@-1.499,40.996 -1.464,40.996 -0.931,41.529 ; -0.991,41.529 -0.931,41.529 ; 11.913,50.605 22.688,50.605 24.768,48.525 U1.59 ; 11.916,50.603 3.188,41.874 -0.585,41.874 -0.931,41.529
PE11: P2.16 U1.60 | length 29
  Top Layer w0.203: P2.16 2.6,40.716 12.083,50.2 ; 12.09,50.202 22.398,50.202 24.268,48.331 U1.60
PE12: P2.8 R2.2 U1.61 | length 45.2
  Top Layer w0.203: P2.8@-1.74,38.316 P2.8@-1.46,38.316 ; P2.8 P2.8@-1.46,38.316 ; U1.61 23.768,48.213 22.183,49.798 12.252,49.798 3.268,40.814 1.951,39.497 -0.279,39.497 P2.8@-1.46,38.316
  Top Layer w0.3: P2.8 -0.573,37.149 1.365,37.149 7.345,43.129 R2.2
PE13: P2.17 R3.2 U1.62 | length 33.5
  Top Layer w0.203: P2.17 1.218,38.176 12.421,49.379 22.032,49.379 23.268,48.143 U1.62
  Top Layer w0.3: R3.2 11.481,48.389 11.505,48.413
PF10: P2.14 U1.47 | length 43.4
  Top Layer w0.203: U1.47 33.151,44.991 v1(33.157,44.985)
  Bottom Layer w0.203: P2.14 0.991,45.745 3.785,45.745 11.176,53.137 ; 11.201,53.138 29.271,53.138 34.02,48.389 34.02,45.849 v1(33.157,44.985)
PWM8: J1.13 P3.5 U1.63 | length 73.2
  Top Layer w0.203: v2(21.473,48.719) 22.111,48.719 22.672,48.158 22.672,48.154 22.768,48.058 U1.63
  Bottom Layer w0.203: v2(21.473,48.719) 21.473,33.309 20.371,32.207 20.371,25.341 25.592,20.12 40.016,20.12 45.085,15.051 45.085,14.275 ; P3.5 45.06,14.249 45.085,14.275 ; J1.13 43.51,0.661 42.62,1.551 42.62,2.843 45.085,5.309 45.085,14.275
PWM9: J1.14 P3.3 U1.19 | length 54
  Top Layer w0.203: v2(23.2,33.911) 23.2,34.241 23.063,34.378 23.063,35.02 23.276,35.234 23.276,36.158 U1.19
  Bottom Layer w0.203: v2(23.2,33.911) 23.2,28.658 23.724,28.135 23.724,22.559 25.759,20.523 40.183,20.523 45.488,15.218 45.488,14.249 ; J1.14 43.498,3.152 45.488,5.142 45.488,14.249 ; P3.3 45.488,14.249
RESETn: P1.10 R1.2 S1.1 S1.2 U1.20 | length 78.7
  Top Layer w0.3: S1.2 S1.1 9.9,72.082 R1.2 v1(11.604,72.124) ; v2(23.759,34.622) 23.768,34.631 U1.20 ; v1(30.642,49.074) v1@30.642,69.85
  Bottom Layer w0.3: v1@11.599,72.128 14.903,75.431 26.542,75.431 28.524,73.449 P1.10 29.533,73.177 30.658,72.052 30.658,69.901 v1(30.709,69.85) ; v2(23.759,34.622) 24.507,34.622 30.464,40.579 30.464,49.074 v1(30.642,49.074)
Rx1: J1.15 P3.6 U1.35 | length 45.2
  Top Layer w0.203: U1.35 32.66,38.991 42.999,28.652 42.999,11.735 ; J1.15 42.316,0.572 42.316,3.581 42.999,4.264 42.999,11.735 ; P3.6 43.024,11.709 42.999,11.735
Rx2: J1.17 P3.8 U1.9 | length 54.2
  Top Layer w0.203: U1.9 26.72,41.491 40.513,27.697 40.513,11.709 ; J1.17 39.688,2.469 40.513,3.294 40.513,11.709 ; P3.8 40.513,11.709
SCL1: J1.2 P3.4 U1.2 | length 71.3
  Top Layer w0.203: U1.2 25.759,44.991 26.268,44.482 29.338,44.482 30.751,45.895 36.057,45.895 47.676,34.276 47.676,11.735 ; J1.2 44.751,-0.599 47.676,2.326 47.676,11.735 ; P3.4 47.65,11.709 47.676,11.735
SCL2: J1.4 P3.13 U1.14 | length 54
  Top Layer w0.203: v2(17.739,38.279) 17.739,38.305 18.425,38.991 U1.14
  Bottom Layer w0.203: v2(17.739,38.279) 17.739,27.403 25.425,19.717 27.908,19.717 32.905,14.72 32.905,14.275 ; P3.13 32.93,14.249 32.905,14.275 ; J1.4 40.958,0.698 32.905,8.751 32.905,14.275
SDA1: J1.1 P3.2 U1.1 | length 72.1
  Top Layer w0.203: U1.1 25.829,45.491 26.435,44.885 29.171,44.885 30.584,46.298 36.224,46.298 48.079,34.443 48.079,11.709 ; J1.1 48.079,1.441 48.079,11.709 ; P3.2 48.079,11.709
SDA2: J1.3 P3.15 U1.13 | length 57.7
  Top Layer w0.203: v2(17.079,37.721) 17.079,38.546 18.023,39.491 U1.13
  Bottom Layer w0.203: v2(17.079,37.721) 17.079,27.493 25.258,19.314 27.676,19.314 32.042,14.948 ; P3.15 32.042,14.948 ; J1.3 40.986,-1.869 39.521,-0.405 39.511,-0.405 38.81,0.297 38.81,0.307 37.167,1.949 37.167,3.919 32.502,8.584 32.502,14.488 32.042,14.948
SWCLK: P1.4 U1.49 | length 32.1
  Top Layer w0.3: P1.4 24.714,73.186 25.706,74.177 29.314,74.177 29.768,73.723 U1.49
SWDIO: P1.2 U1.50 | length 29.2
  Top Layer w0.3: P1.2 23.214,73.177 22.514,72.477 22.514,68.377 29.268,61.623 U1.50
SWO: P1.6 U1.51 | length 34.1
  Top Layer w0.3: v1(24.814,74.577) 23.036,74.577 22.014,73.555 22.014,68.17 28.768,61.416 U1.51
  Bottom Layer w0.3: v1@24.814,74.577 25.984,73.407 P1.6
THR0: J1.5 P3.10 U1.31 | length 43.7
  Top Layer w0.203: U1.31 29.268,35.234 37.897,26.605 37.897,11.709 ; P3.10 37.897,11.709 ; J1.5 39.688,-0.572 39.334,-0.218 39.324,-0.218 38.81,0.297 38.81,0.307 37.54,1.577 37.54,3.732 37.897,4.089 37.897,11.709
THR1: J1.6 P3.20 U1.21 | length 49.8
  Top Layer w0.203: U1.21 24.268,35.23 24.546,34.952 24.546,34.33 23.472,33.255 21.98,33.255 20.304,31.579 20.304,20.031 25.146,15.189 25.146,11.709 ; P3.20 25.146,11.709 ; v2(34.138,3.226) 33.401,3.962 31.953,3.962 25.146,10.77 25.146,11.709
  Bottom Layer w0.203: v2(34.138,3.226) 34.09,3.274 34.09,2.487 35.514,1.062 35.514,1.052 37.166,-0.599 J1.6
THR2: J1.7 P3.12 U1.29 | length 44.2
  Top Layer w0.203: U1.29 28.268,34.899 35.445,27.722 35.445,11.709 ; P3.12 35.445,11.709 ; J1.7 35.906,-1.869 35,-0.963 35,-0.191 35.487,0.297 35.487,1.025 35,1.512 35,2.505 35.445,2.95 35.445,11.709
THR3: J1.8 P3.11 U1.30 | length 42.1
  Top Layer w0.203: U1.30 28.768,35.099 37.49,26.377 37.49,14.275 ; J1.8 36.103,-0.374 36.103,0.891 37.136,1.924 37.136,3.899 37.49,4.253 37.49,14.275 ; P3.11 37.465,14.249 37.49,14.275
THR4: J1.9 P3.22 U1.17 | length 47.2
  Top Layer w0.203: U1.17 22.26,36.158 22.26,35.358 19.498,32.596 19.498,19.697 22.682,16.513 22.682,11.709 ; P3.22 22.682,11.709 ; J1.9 33.351,-1.869 29.724,1.758 29.724,2.649 22.682,9.69 22.682,11.709
THR5: J1.10 P3.21 U1.18 | length 44.5
  Top Layer w0.203: U1.18 22.768,35.296 19.901,32.429 19.901,19.864 24.385,15.38 24.385,15.357 24.743,14.999 24.743,14.224 ; P3.21 24.717,14.249 24.743,14.224 ; J1.10 33.338,0.698 30.836,3.201 30.836,4.51 24.743,10.603 24.743,14.224
THR6: J1.11 P3.24 U1.15 | length 49.2
  Top Layer w0.203: U1.15 19.539,38.491 18.692,37.643 18.692,12.541 20.345,10.887 ; P3.24 20.361,10.887 20.345,10.887 ; J1.11 30.578,-1.869 28.772,-0.064 28.772,2.46 20.345,10.887
THR7: J1.12 P3.23 U1.16 | length 45.6
  Top Layer w0.203: U1.16 19.609,37.991 19.095,37.476 19.095,19.53 22.279,16.346 22.279,14.3 ; P3.23 22.228,14.249 22.279,14.3 ; J1.12 29.272,0.927 29.272,2.53 22.279,9.523 22.279,14.3
Tx1: J1.16 P3.7 U1.34 | length 43.5
  Top Layer w0.203: U1.34 32.59,38.491 42.596,28.485 42.596,14.249 ; J1.16 41.913,2.895 41.913,3.748 42.596,4.431 42.596,14.249 ; P3.7 42.596,14.249
Tx2: J1.18 P3.9 U1.10 | length 52.7
  Top Layer w0.203: U1.10 26.65,40.991 40.11,27.53 40.11,14.275 ; J1.18 40.11,3.632 40.11,14.275 ; P3.9 40.084,14.249 40.11,14.275
USB_VBUS: P2.5 U1.52 | length 36.4
  Top Layer w0.203: v2@28.051,49.024 28.268,48.807 U1.52
  Bottom Layer w0.203: P2.5 -1.575,45.796 -0.203,44.425 3.835,44.425 11.43,52.019 ; 11.43,52.021 24.267,52.021 26.019,50.268 26.807,50.268 v2@28.051,49.024
  other v2: 27.95,49.201
USB_VREGI: P2.4 U1.45 | length 48.4
  Top Layer w0.203: U1.45 33.636,43.991 v1(34.554,44.909)
  Bottom Layer w0.203: P2.4 -1.6,48.285 -0.508,47.193 4.662,47.193 11.009,53.54 ; 11.024,53.542 29.629,53.542 34.554,48.617 v1(34.554,44.909)
VCC: C4.2 C5.2 C6.2 C7.2 C8.2 C9.1 C10.2 C11.2 C12.1 J1.P2B P1.1 P2.9 R4.2 S1.3 S1.4 U1.7 U1.23 U1.26 U1.27 U1.39 U1.55 | length 53.9
  Top Layer w0.203: C8.2 18.368,42.491 U1.7 ; U1.26 U1.27 ; v1(26.768,45.691) U1.55 26.768,49.445 27.327,50.004 C11.2
  Top Layer w0.3: C6.2 22.914,32.059 24.307,33.452 24.824,33.969 24.859,33.969 25.268,34.379 U1.23 ; U1.27 27.268,34.668 28.922,33.014 C9.1 ; U1.39 33.544,40.991 v3(34.399,40.136)
  Top Layer w0.508: v3(1.855,60.546) S1.4 S1.3 ; v3(16.125,43.041) C8.2 ; v3(21.417,31.341) C6.2 ; C9.1 29.731,31.241 v3(30.617,30.355) ; v3(34.399,40.136) C4.2 ; v3(41.524,74.79) R4.2
  Bottom Layer w0.508: C5.2 C7.2 26.768,43.295 v1(26.768,45.691) ; C12.1 C10.2 29.731,31.241 v3(30.617,30.355)
pads on no net: J1.P1A J1.P2A P1.7 P1.8 P1.9 P2.1 U1.5 U1.6 U1.38 U1.41 U1.43 U1.46 U1.48 U1.54 U1.64

## Polygon pours and split planes (outlines as drawn)
GND on Ground Plane (split plane): 52.519,78.942 53.022,78.807 53.494,78.587 53.92,78.289 54.289,77.92 54.587,77.494 54.807,77.022 54.942,76.519 54.99,75.978 54.99,0.022 54.942,-0.519 54.807,-1.022 54.587,-1.494 54.289,-1.92 53.92,-2.289 53.494,-2.587 53.022,-2.807 52.519,-2.942 51.978,-2.99 0.022,-2.99 -0.519,-2.942 -1.022,-2.807 -1.494,-2.587 -1.92,-2.289 -2.289,-1.92 -2.587,-1.494 -2.807,-1.022 -2.942,-0.519 -2.99,0.022 -2.99,75.978 -2.942,76.519 -2.807,77.022 -2.587,77.494 -2.289,77.92 -1.92,78.289 -1.494,78.587 -1.022,78.807 -0.519,78.942 0.022,78.99 51.978,78.99
VCC on Power Plane (split plane): 52.519,78.942 53.022,78.807 53.494,78.587 53.92,78.289 54.289,77.92 54.587,77.494 54.807,77.022 54.942,76.519 54.99,75.978 54.99,0.022 54.942,-0.519 54.807,-1.022 54.587,-1.494 54.289,-1.92 53.92,-2.289 53.494,-2.587 53.022,-2.807 52.519,-2.942 51.978,-2.99 0.022,-2.99 -0.519,-2.942 -1.022,-2.807 -1.494,-2.587 -1.92,-2.289 -2.289,-1.92 -2.587,-1.494 -2.807,-1.022 -2.942,-0.519 -2.99,0.022 -2.99,75.978 -2.942,76.519 -2.807,77.022 -2.587,77.494 -2.289,77.92 -1.92,78.289 -1.494,78.587 -1.022,78.807 -0.519,78.942 0.022,78.99 51.978,78.99

## Silkscreen, mask and mechanical layers (free items; w line width, h text height)
Top Overlay:
  drawing of 1208 lines, arcs and shapes, not listed
  text "BDA & AT" at 22.25,58.598 h1.52
  text "PD4 / PD8       PD5 / PE5       PC6 / USB_VREGI PE7 / USB_VBUS  PF10 / PE9       PE8 / PE10      PE11  / PE12      PE13 / VCC       GND" at -2.794,20.447 h1
Mechanical 1:
  lines w0.1: 26,-10.084 26,5.175 ; 26,-4.572 26,6.096 26,86.004

## Dimensions
1.194,-3.505 to 53.086,2.997 on Mechanical 1